# EAGLE board GasSensorBoard (EAGLE 9.6.2)
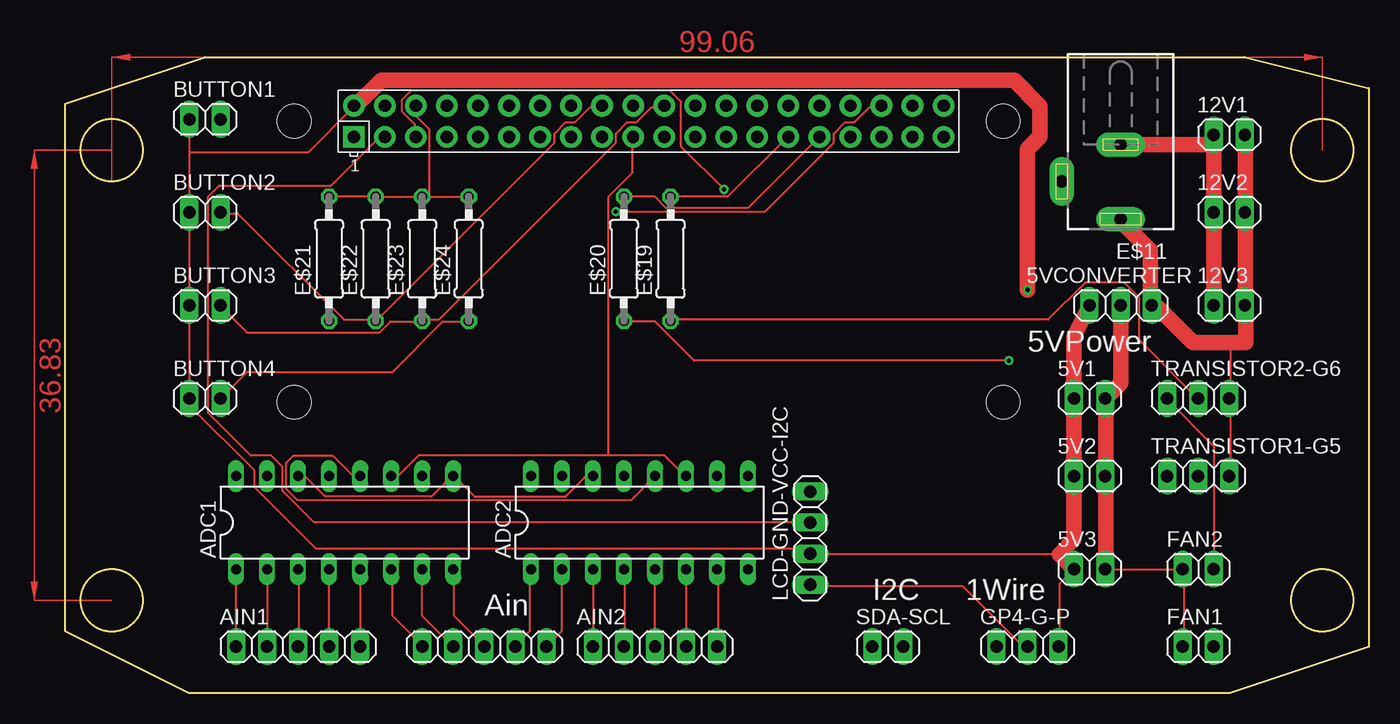
[diagram p0: board, top side]
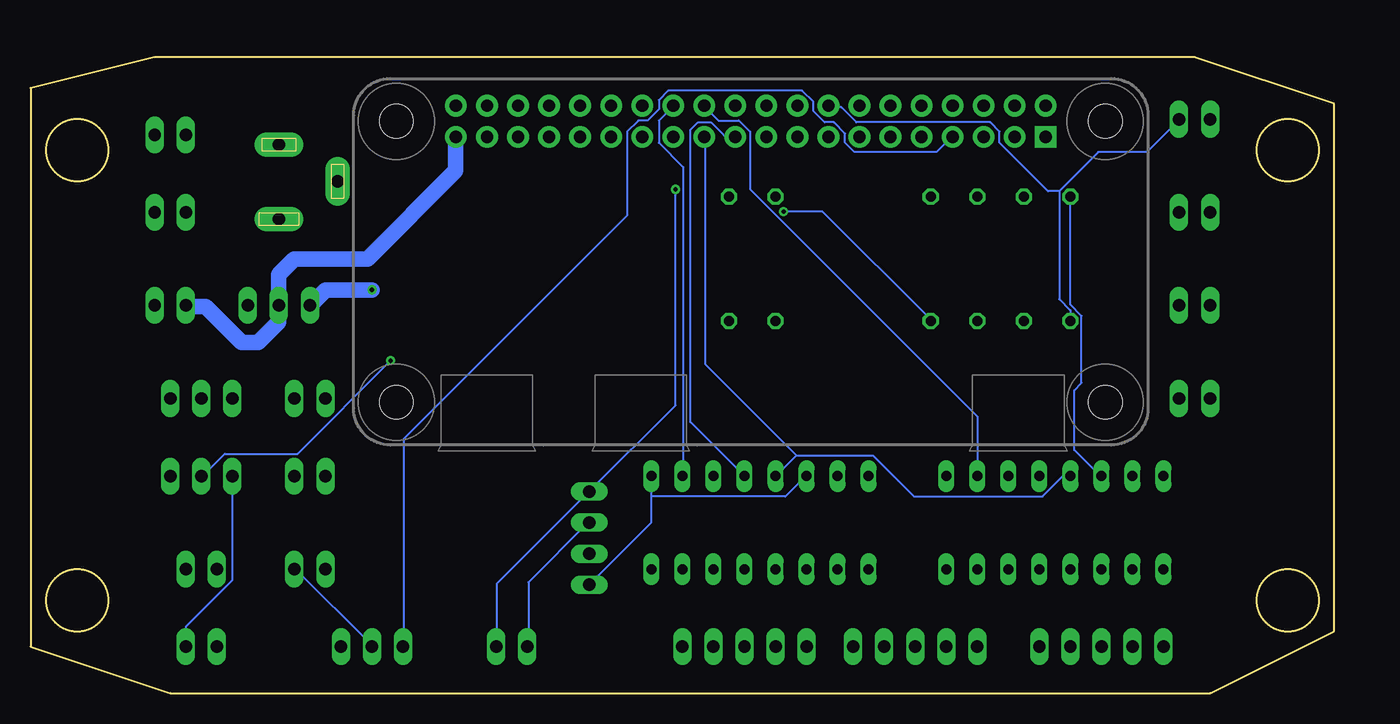
[diagram p1: board, bottom side, seen from below]

Size 106.68 x 52.07 mm. Coordinates in mm from the lower left corner, seen from the top.
Outline: 0,48.26 11.43,52.07 96.52,52.07 106.68,49.53 106.68,3.81 95.25,0 10.16,0 0,5.08 0,48.26
Outline: circle at 3.81,44.45 radius 2.54
Outline: circle at 3.81,7.62 radius 2.54
Outline: circle at 102.87,44.45 radius 2.54
Outline: circle at 102.87,7.62 radius 2.54
Copper layers (1*16): Top 0.035mm / dielectric 1.5mm / Bottom 0.035mm
Design rules "default": minimum track width 6mil, minimum drill 0.35mm, track to track 6mil, track to pad 6mil, pad to pad 6mil, via to via 6mil, smd to smd 6mil, copper to edge 40mil, drill to drill 6mil, minimum pad ring 10mil, minimum via ring 8mil, stop-mask expansion 4mil, vias tented up to drill 0mil, thermal gap 10mil

## Footprints (pad centres in the part's own frame; a part is rotated, then mirrored left to right if it is on the bottom)
1X02 = drill 1.016 long: 1 -1.27,0; 2 1.27,0
1X03 = drill 1.016 long: 1 -2.54,0; 2 0,0; 3 2.54,0
DIL16 = drill 0.813 long: 1 -8.89,-3.81; 2 -6.35,-3.81; 3 -3.81,-3.81; 4 -1.27,-3.81; 5 1.27,-3.81; 6 3.81,-3.81; 7 6.35,-3.81; 8 8.89,-3.81; 9 8.89,3.81; 10 6.35,3.81; 11 3.81,3.81; 12 1.27,3.81; 13 -1.27,3.81; 14 -3.81,3.81; 15 -6.35,3.81; 16 -8.89,3.81
1X05 = drill 1.016 long: 1 -5.08,0; 2 -2.54,0; 3 0,0; 4 2.54,0; 5 5.08,0
RASPBERRYPI_BASTELSTUBE_V13_RASPI_BOARD_B+_FULL = drill 1 pad 1.778 square: 1 8.37,25.23 | drill 1 pad 1.778: 2 8.37,27.77; 3 10.91,25.23; 4 10.91,27.77; 5 13.45,25.23; 6 13.45,27.77; 7 15.99,25.23; 8 15.99,27.77; 9 18.53,25.23; 10 18.53,27.77; 11 21.07,25.23; 12 21.07,27.77; 13 23.61,25.23; 14 23.61,27.77; 15 26.15,25.23; 16 26.15,27.77; 17 28.69,25.23; 18 28.69,27.77; 19 31.23,25.23; 20 31.23,27.77; 21 33.77,25.23; 22 33.77,27.77; 23 36.31,25.23; 24 36.31,27.77; 25 38.85,25.23; 26 38.85,27.77; 27 41.39,25.23; 28 41.39,27.77; 29 43.93,25.23; 30 43.93,27.77; 31 46.47,25.23; 32 46.47,27.77; 33 49.01,25.23; 34 49.01,27.77; 35 51.55,25.23; 36 51.55,27.77; 37 54.09,25.23; 38 54.09,27.77; 39 56.63,25.23; 40 56.63,27.77 | hole 2.75: 3.5,3.5; 3.5,26.5; 61.5,3.5; 61.5,26.5
DCJ0202 = drill 1 pad 2 long: 1 0,3.1; 2 4.8,0; 3 0,-3
0207/10 = drill 0.813 octagon: 1 -5.08,0; 2 5.08,0
1X04 = drill 1.016 long: 1 -3.81,0; 2 -1.27,0; 3 1.27,0; 4 3.81,0

## Placement (x,y rotation side)
5V1  [1X02]  83.82,24.13 0 top
5V2  [1X02]  83.82,17.78 0 top
5V3  [1X02]  83.82,10.16 0 top
5VCONVERTER  [1X03]  86.36,31.75 0 top
12V1  [1X02]  95.25,45.72 0 top
12V2  [1X02]  95.25,39.37 0 top
12V3  [1X02]  95.25,31.75 0 top
ADC1  [DIL16]  22.86,13.97 0 top
ADC2  [DIL16]  46.99,13.97 0 top
AIN1  [1X05]  19.05,3.81 0 top
AIN2  [1X05]  48.26,3.81 0 top
BUTTON1  [1X02]  11.43,46.99 0 top
BUTTON2  [1X02]  11.43,39.37 0 top
BUTTON3  [1X02]  11.43,31.75 0 top
BUTTON4  [1X02]  11.43,24.13 0 top
E$3  [RASPBERRYPI_BASTELSTUBE_V13_RASPI_BOARD_B+_FULL]  15.24,20.32 0 top
E$5  [1X05]  34.29,3.81 0 top
E$11  [DCJ0202]  86.36,41.91 180 top
E$19  [0207/10]  49.53,35.56 90 top
E$20  [0207/10]  45.72,35.56 90 top
E$21  [0207/10]  21.59,35.56 90 top
E$22  [0207/10]  25.4,35.56 90 top
E$23  [0207/10]  29.21,35.56 90 top
E$24  [0207/10]  33.02,35.56 90 top
FAN1  [1X02]  92.71,3.81 0 top
FAN2  [1X02]  92.71,10.16 0 top
GP4-G-P  [1X03]  78.74,3.81 0 top
LCD-GND-VCC-I2C  [1X04]  60.96,12.7 90 top
SDA-SCL  [1X02]  67.31,3.81 0 top
TRANSISTOR1-G5  [1X03]  92.71,17.78 0 top
TRANSISTOR2-G6  [1X03]  92.71,24.13 0 top

## Library data of the parts
5V1-5V3 5VCONVERTER 12V1-12V3 AIN1 AIN2 BUTTON1-BUTTON4 E$5 FAN1 FAN2 GP4-G-P LCD-GND-VCC-I2C SDA-SCL TRANSISTOR1-G5 TRANSISTOR2-G6 = pinhead
ADC1 ADC2 = 74xx-us
E$3 = RPI-Zero
E$11 = con-jack
E$19-E$24 = rcl

## Nets
F1: FAN1.2 TRANSISTOR1-G5.1
S$1: ADC1.1 AIN1.1
S$2: ADC1.2 AIN1.2
S$3: ADC1.3 AIN1.3
S$4: ADC1.4 AIN1.4
S$5: ADC1.5 AIN1.5
S$6: ADC1.6 E$5.1
S$7: ADC1.7 E$5.2
S$8: ADC1.8 E$5.3
S$9: ADC2.1 E$5.4
S$10: ADC2.2 E$5.5
S$11: ADC2.3 AIN2.1
S$12: ADC2.4 AIN2.2
S$13: ADC2.5 AIN2.3
S$14: ADC2.6 AIN2.4
S$15: ADC2.7 AIN2.5
S$16: 5VCONVERTER.3 12V1.2 12V2.2 12V3.2 E$11.1 TRANSISTOR1-G5.3 TRANSISTOR2-G6.3
S$18: ADC1.13 ADC2.13 E$3.23
S$19: ADC1.10 E$3.24
S$20: ADC2.10 E$3.26
S$21: ADC1.11 ADC2.11 E$3.19
S$22: ADC1.12 ADC2.12 E$3.21
S$23: E$3.3 LCD-GND-VCC-I2C.3 SDA-SCL.1
S$24: E$3.5 LCD-GND-VCC-I2C.4 SDA-SCL.2
S$25: E$3.7 GP4-G-P.1
S$27: FAN2.2 TRANSISTOR2-G6.1
S$29: E$19.1 TRANSISTOR2-G6.2
S$30: E$20.1 TRANSISTOR1-G5.2
S$31: E$3.31 E$20.2
S$32: E$3.29 E$19.2
S$33: 5V1.2 5V2.2 5V3.2 5VCONVERTER.2 12V1.1 12V2.1 12V3.1 ADC1.9 ADC1.14 ADC2.9 ADC2.14 E$3.6 E$3.39 E$11.3 E$21.2 E$22.2 E$23.2 E$24.2 FAN1.1 FAN2.1 GP4-G-P.2 LCD-GND-VCC-I2C.1
S$34: BUTTON4.2 E$3.36 E$24.1
S$35: BUTTON3.2 E$3.22 E$23.1
S$36: BUTTON2.2 E$3.18 E$22.1
S$37: BUTTON1.2 E$3.16 E$21.1
S$38: 5V1.1 5V2.1 5V3.1 5VCONVERTER.1 BUTTON1.1 BUTTON2.1 BUTTON3.1 BUTTON4.1 E$3.2 GP4-G-P.3 LCD-GND-VCC-I2C.2

## Tracks (layer width: path | path; a pad name or v marks a point on that pad's centre or on a via)
F1
  Bottom 0.152: FAN1.2 93.98,5.44 90.17,9.25 TRANSISTOR1-G5.1
S$1
  Top 0.152: AIN1.1 ADC1.1
S$2
  Top 0.152: ADC1.2 16.56,10.16 16.56,3.91 AIN1.2
S$3
  Top 0.152: ADC1.3 19.15,10.16 19.15,3.91 AIN1.3
S$4
  Top 0.152: AIN1.4 ADC1.4
S$5
  Top 0.152: ADC1.5 24.18,10.16 24.18,3.91 AIN1.5
S$6
  Top 0.152: ADC1.6 26.77,10.16 26.77,6.35 29.21,3.91 E$5.1
S$7
  Top 0.152: ADC1.7 29.21,6.35 E$5.2
S$8
  Top 0.152: ADC1.8 31.8,10.16 31.8,6.35 34.24,3.91 E$5.3
S$9
  Top 0.152: ADC2.1 38.05,10.16 38.05,5.13 36.83,3.91 E$5.4
S$10
  Top 0.152: ADC2.2 40.64,5.13 39.42,3.91 E$5.5
S$11
  Top 0.152: ADC2.3 43.23,10.16 43.23,3.91 AIN2.1
S$12
  Top 0.152: ADC2.4 45.82,10.16 45.82,3.91 AIN2.2
S$13
  Top 0.152: AIN2.3 ADC2.5
S$14
  Top 0.152: ADC2.6 50.85,10.16 50.85,3.91 AIN2.4
S$15
  Top 0.152: ADC2.7 53.44,10.16 53.44,3.91 AIN2.5
S$16
  Top 0.152: 88.8,31.8 5VCONVERTER.3 88.95,31.65 | 86.36,38.66 E$11.1 | TRANSISTOR1-G5.3 95.35,17.78 95.35,24.03 TRANSISTOR2-G6.3 95.35,24.18 95.35,28.7 | 96.57,31.8 12V3.2 | 96.57,39.27 12V2.2 96.57,39.42 | 96.57,45.67 12V1.2
  Top 1.27: 88.8,31.8 88.8,36.22 86.36,38.66 | 96.57,39.27 96.57,31.8 | 96.57,39.42 96.57,45.67 | 12V3.2 96.62,31.65 96.62,28.7 95.35,28.7 92.25,28.7 89.31,31.65 88.95,31.65
S$18
  Bottom 0.152: ADC1.13 22.2,17.78 23.88,16.1 34.39,16.1 37.74,19.46 43.99,19.46 | 43.99,19.46 45.67,17.78 ADC2.13 | 43.99,19.46 51.46,26.92 51.46,45.52 E$3.23
S$19
  Bottom 0.152: ADC1.10 29.21,22.66 47.8,41.25 47.8,45.97 48.72,46.89 50.39,46.89 51.46,47.96 E$3.24
S$20
  Bottom 0.152: ADC2.10 53.29,17.78 53.29,43.08 55.27,45.06 55.27,46.89 54.2,47.96 E$3.26
S$21
  Top 0.152: ADC1.11 27.23,17.78 28.91,19.46 44.45,19.46 | 44.45,19.46 49.02,19.46 50.7,17.78 ADC2.11 | 44.45,19.46 44.45,40.64 46.43,42.62 46.43,45.52 E$3.19
S$22
  Top 0.152: ADC1.12 23.57,17.78 21.89,19.46 18.69,19.46 18.09,18.85 18.09,16.71 19,15.8 46.28,15.8 ADC2.12
  Bottom 0.152: ADC2.12 52.68,22.2 52.68,46.13 52.07,46.74 51,46.74 49.94,45.67 49.02,45.67 E$3.21
S$23
  Top 0.152: LCD-GND-VCC-I2C.3 20.37,13.97 17.78,16.56 17.78,18.54 16.87,19.46 15.19,19.46 11.68,22.96 11.68,40.64 12.6,41.55 21.74,41.55 25.7,45.52 26.01,45.52 E$3.3
  Bottom 0.152: SDA-SCL.1 65.94,3.91 65.94,9.09 61.06,13.97 LCD-GND-VCC-I2C.3
S$24  (via drill 0.35)
  Top 0.152: v53.9,41.25 50.39,44.76 50.39,48.41 49.48,49.33 28.3,49.33 27.53,48.57 27.53,47.65 28.6,46.58 28.6,45.67 E$3.5
  Bottom 0.152: SDA-SCL.2 68.53,3.91 68.53,8.94 LCD-GND-VCC-I2C.4 53.9,23.57 v53.9,41.25
S$25
  Bottom 0.152: GP4-G-P.1 76.15,3.91 76.15,20.83 57.86,39.12 57.86,45.97 56.95,46.89 56.19,46.89 55.27,47.8 55.27,48.57 54.51,49.33 43.54,49.33 42.62,48.41 42.62,47.65 41.71,46.74 40.95,46.74 40.03,45.82 40.03,45.06 39.27,44.3 32.56,44.3 31.34,45.52 E$3.7
S$27
  Top 0.152: FAN2.2 93.98,20.22 90.17,24.03 TRANSISTOR2-G6.1
S$29
  Top 0.152: E$19.1 49.63,30.58 80.42,30.58 83.46,33.63 86.66,33.63 87.88,32.41 87.88,28.9 92.61,24.18 TRANSISTOR2-G6.2
S$30  (via drill 0.35)
  Top 0.152: v77.22,27.23 51.46,27.23 48.26,30.43 45.82,30.43 E$20.1
  Bottom 0.152: v77.22,27.23 84.84,19.61 90.78,19.61 92.61,17.78 TRANSISTOR1-G5.2
S$31
  Top 0.152: E$20.2 48.26,40.64 49.17,39.73 55.88,39.73 61.67,45.52 E$3.31
S$32
  Top 0.152: E$19.2 54.2,40.64 59.08,45.52 E$3.29
S$33
  Top 0.152: 93.98,44.91 12V1.1 93.98,45.67 | E$11.3 | 85.14,24.03 5V1.2 | FAN1.1 91.54,3.91 91.54,10.16 FAN2.1 85.14,10.16 5V3.2 | 85.14,17.78 5V2.2 | E$21.2 E$22.2 E$23.2 29.82,40.64 | 29.82,40.64 E$24.2 | 29.82,40.64 29.82,46.13 28.75,47.19 28.75,47.96 E$3.6 | ADC1.14 19.61,17.78 21.29,16.1 29.97,16.1 31.65,17.78 ADC1.9 31.8,17.78 33.48,16.1 40.95,16.1 42.62,17.78 ADC2.14 | GP4-G-P.2 78.74,3.91 78.28,3.91 73.41,8.79 61.06,8.79 LCD-GND-VCC-I2C.1
  Top 1.27: 12V3.1 12V2.1 93.98,44.91 E$11.3 | 85.14,24.03 85.14,17.78 85.14,10.16 | 5VCONVERTER.2 86.36,25.4 5V1.2
  Bottom 0.152: GP4-G-P.2 78.74,3.91 84.99,10.16 5V3.2 | 93.98,31.65 12V3.1 | 55.88,16.1 55.88,13.97 LCD-GND-VCC-I2C.1 | 55.88,16.1 ADC2.9 | 55.88,16.1 44.91,16.1 43.23,17.78 ADC2.14 | E$21.2 21.59,31.8 20.68,30.89 20.68,25.4 21.29,24.79 21.29,19.91 19.15,17.78 ADC1.14 | 71.88,45.52 E$3.39
  Bottom 1.27: 93.98,31.65 92.35,31.65 89.41,28.7 88.04,28.7 86.36,30.38 5VCONVERTER.2 86.36,34.29 85.09,35.56 79.1,35.56 71.88,42.77 71.88,45.52
S$34  (via drill 0.35)
  Top 0.152: BUTTON4.2 14.88,26.31 26.77,26.31 30.89,30.43 33.02,30.43 E$24.1 | v45.06,39.42 57.25,39.42 62.89,45.06 62.89,45.82 63.81,46.74 64.57,46.74 65.79,47.96 66.7,47.96 E$3.36
  Bottom 0.152: v45.06,39.42 41.86,39.42 33.02,30.58 E$24.1
S$35
  Top 0.152: BUTTON3.2 12.75,31.65 14.88,29.51 25.7,29.51 26.62,30.43 29.21,30.43 E$23.1 29.21,30.58 30.58,30.58 45.06,45.06 45.06,45.82 45.97,46.74 46.74,46.74 47.95,47.96 48.87,47.96 E$3.22
S$36
  Top 0.152: BUTTON2.2 12.75,39.27 14.12,39.27 22.81,30.58 25.4,30.58 E$22.1 25.4,30.43 40.03,45.06 40.03,45.82 40.95,46.74 41.71,46.74 42.93,47.96 43.84,47.96 E$3.18
S$37
  Bottom 0.152: E$21.1 21.59,31.34 22.5,32.26 22.5,41.1 | 22.5,41.1 19.3,44.3 15.34,44.3 12.75,46.89 BUTTON1.2 | 22.5,41.1 23.42,41.1 27.38,45.06 27.38,45.97 28.14,46.74 39.12,46.74 40.34,47.96 41.25,47.96 E$3.16
S$38  (via drill 0.35)
  Top 0.152: BUTTON1.1 10.16,44.3 | 10.16,44.3 BUTTON2.1 BUTTON3.1 BUTTON4.1 10.16,23.57 15.49,18.24 15.49,16.87 20.52,11.84 60.6,11.84 60.91,11.53 LCD-GND-VCC-I2C.2 61.06,11.38 81.33,11.38 | 10.16,44.3 19.91,44.3 23.57,47.96 E$3.2 | 5V3.1 81.33,8.94 81.33,3.91 GP4-G-P.3
  Top 1.27: 5VCONVERTER.1 82.55,29.21 5V1.1 5V2.1 82.55,12.6 81.33,11.38 5V3.1 | E$3.2 23.78,48.09 25.88,50.19 77.65,50.19 79.77,48.07 79.77,45.57 78.74,44.54 v78.74,33.02
  Bottom 1.27: 5VCONVERTER.1 82.55,33.02 v78.74,33.02
(copper drawn outside any net)
  shapes: Top area x3

## Text on the board
tNames: 5VPower | I2C | 1Wire | Ain